# Altium PCB 主控.PcbDoc
Units mil, origin at the board's own origin, x right, y up, seen from the top; angles counter-clockwise.
Board outline 2677.17 x 2677.17 mil, 2 copper layers (Top Layer, Bottom Layer); 105 components, 91 nets, 370 pads, 96 vias.
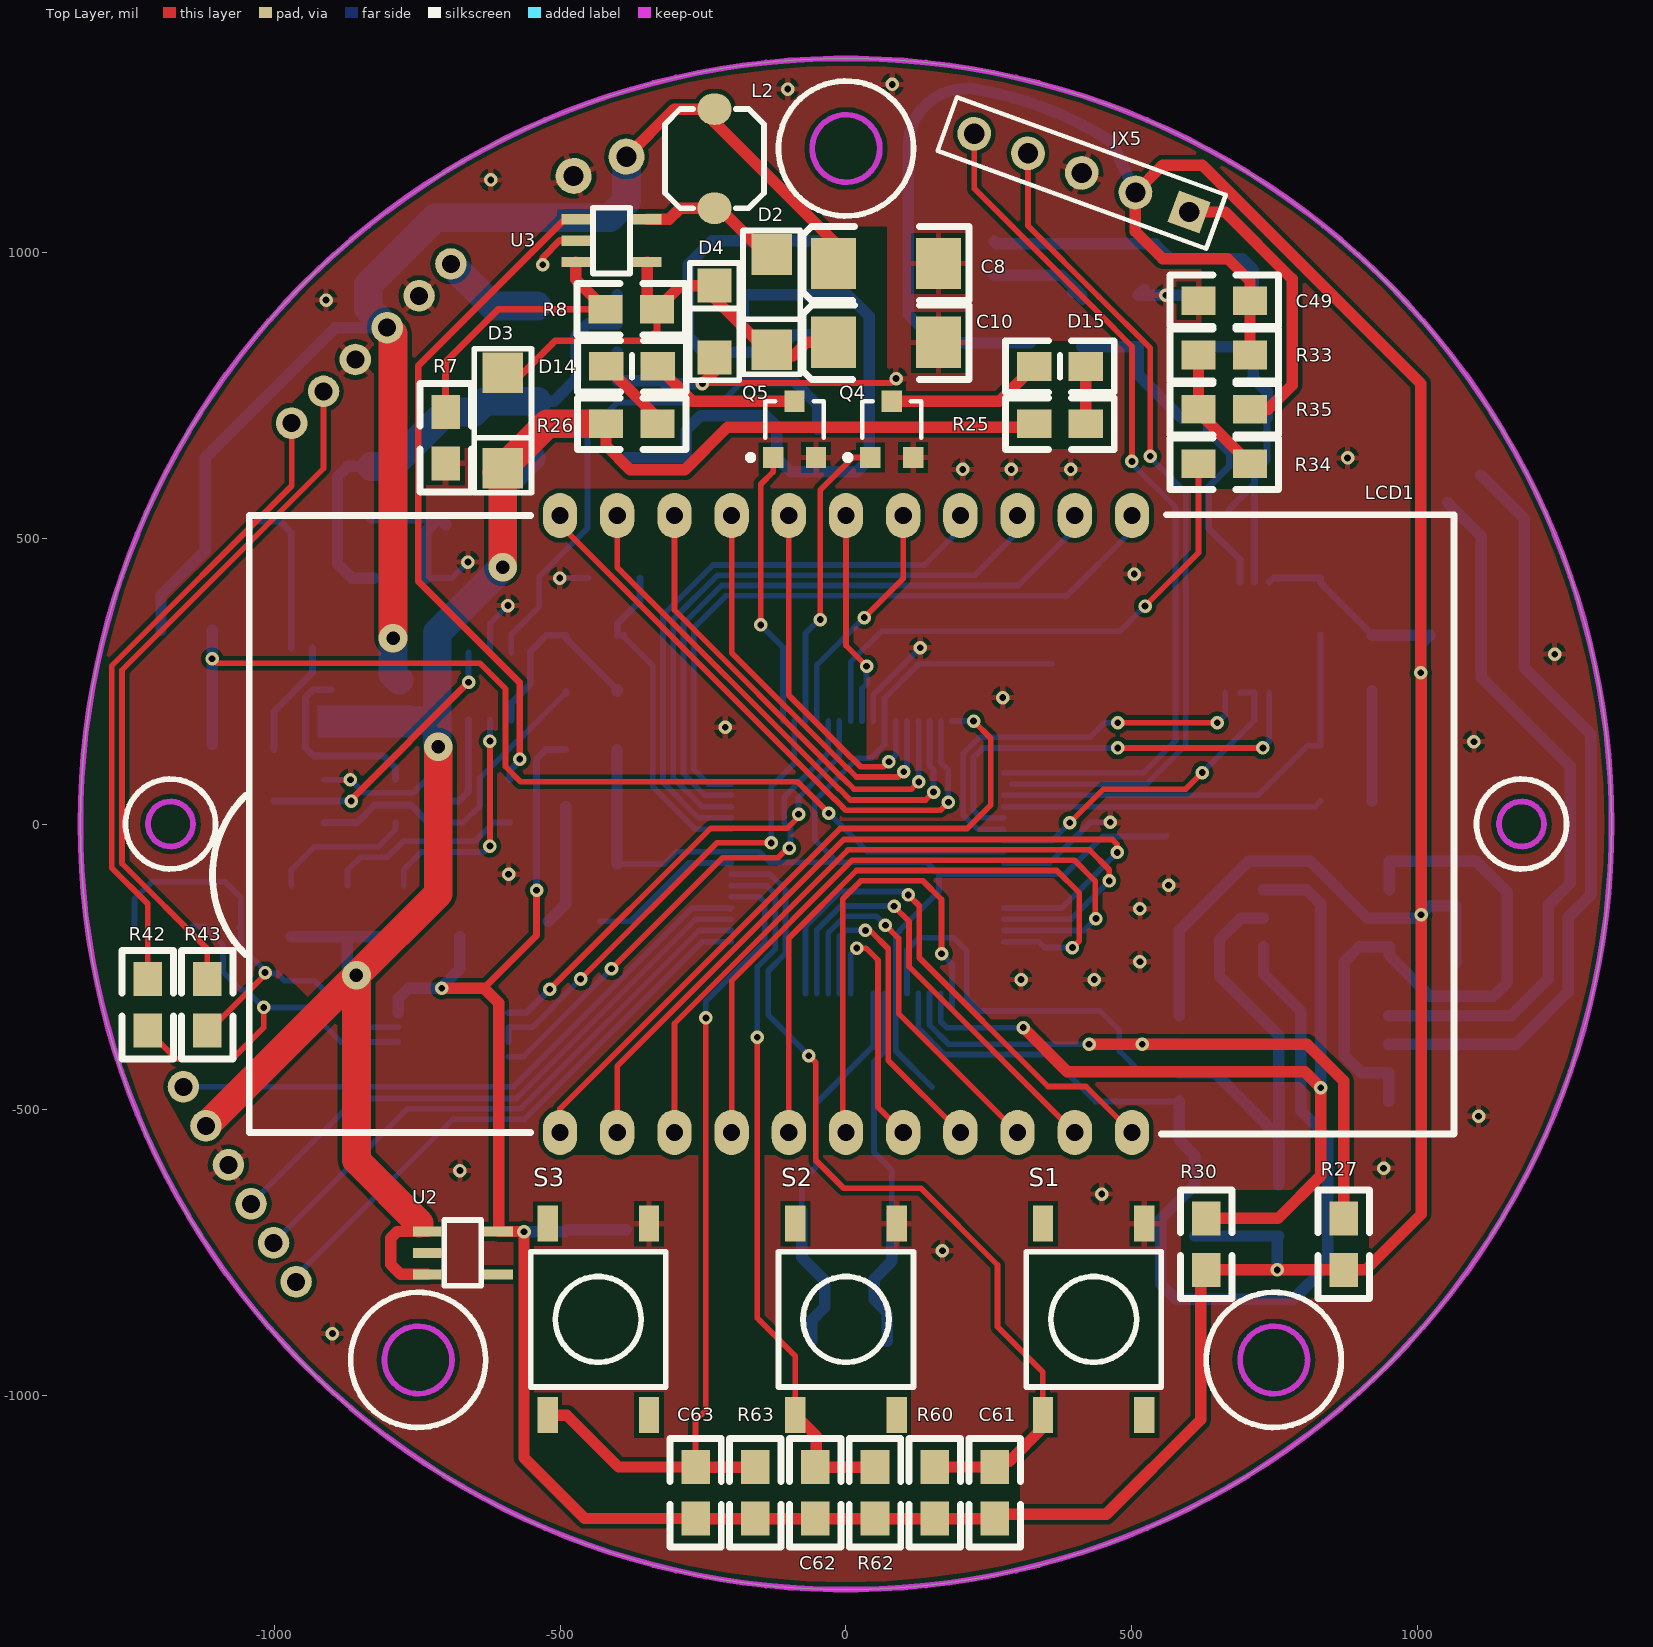
[diagram p0: Top Layer view]
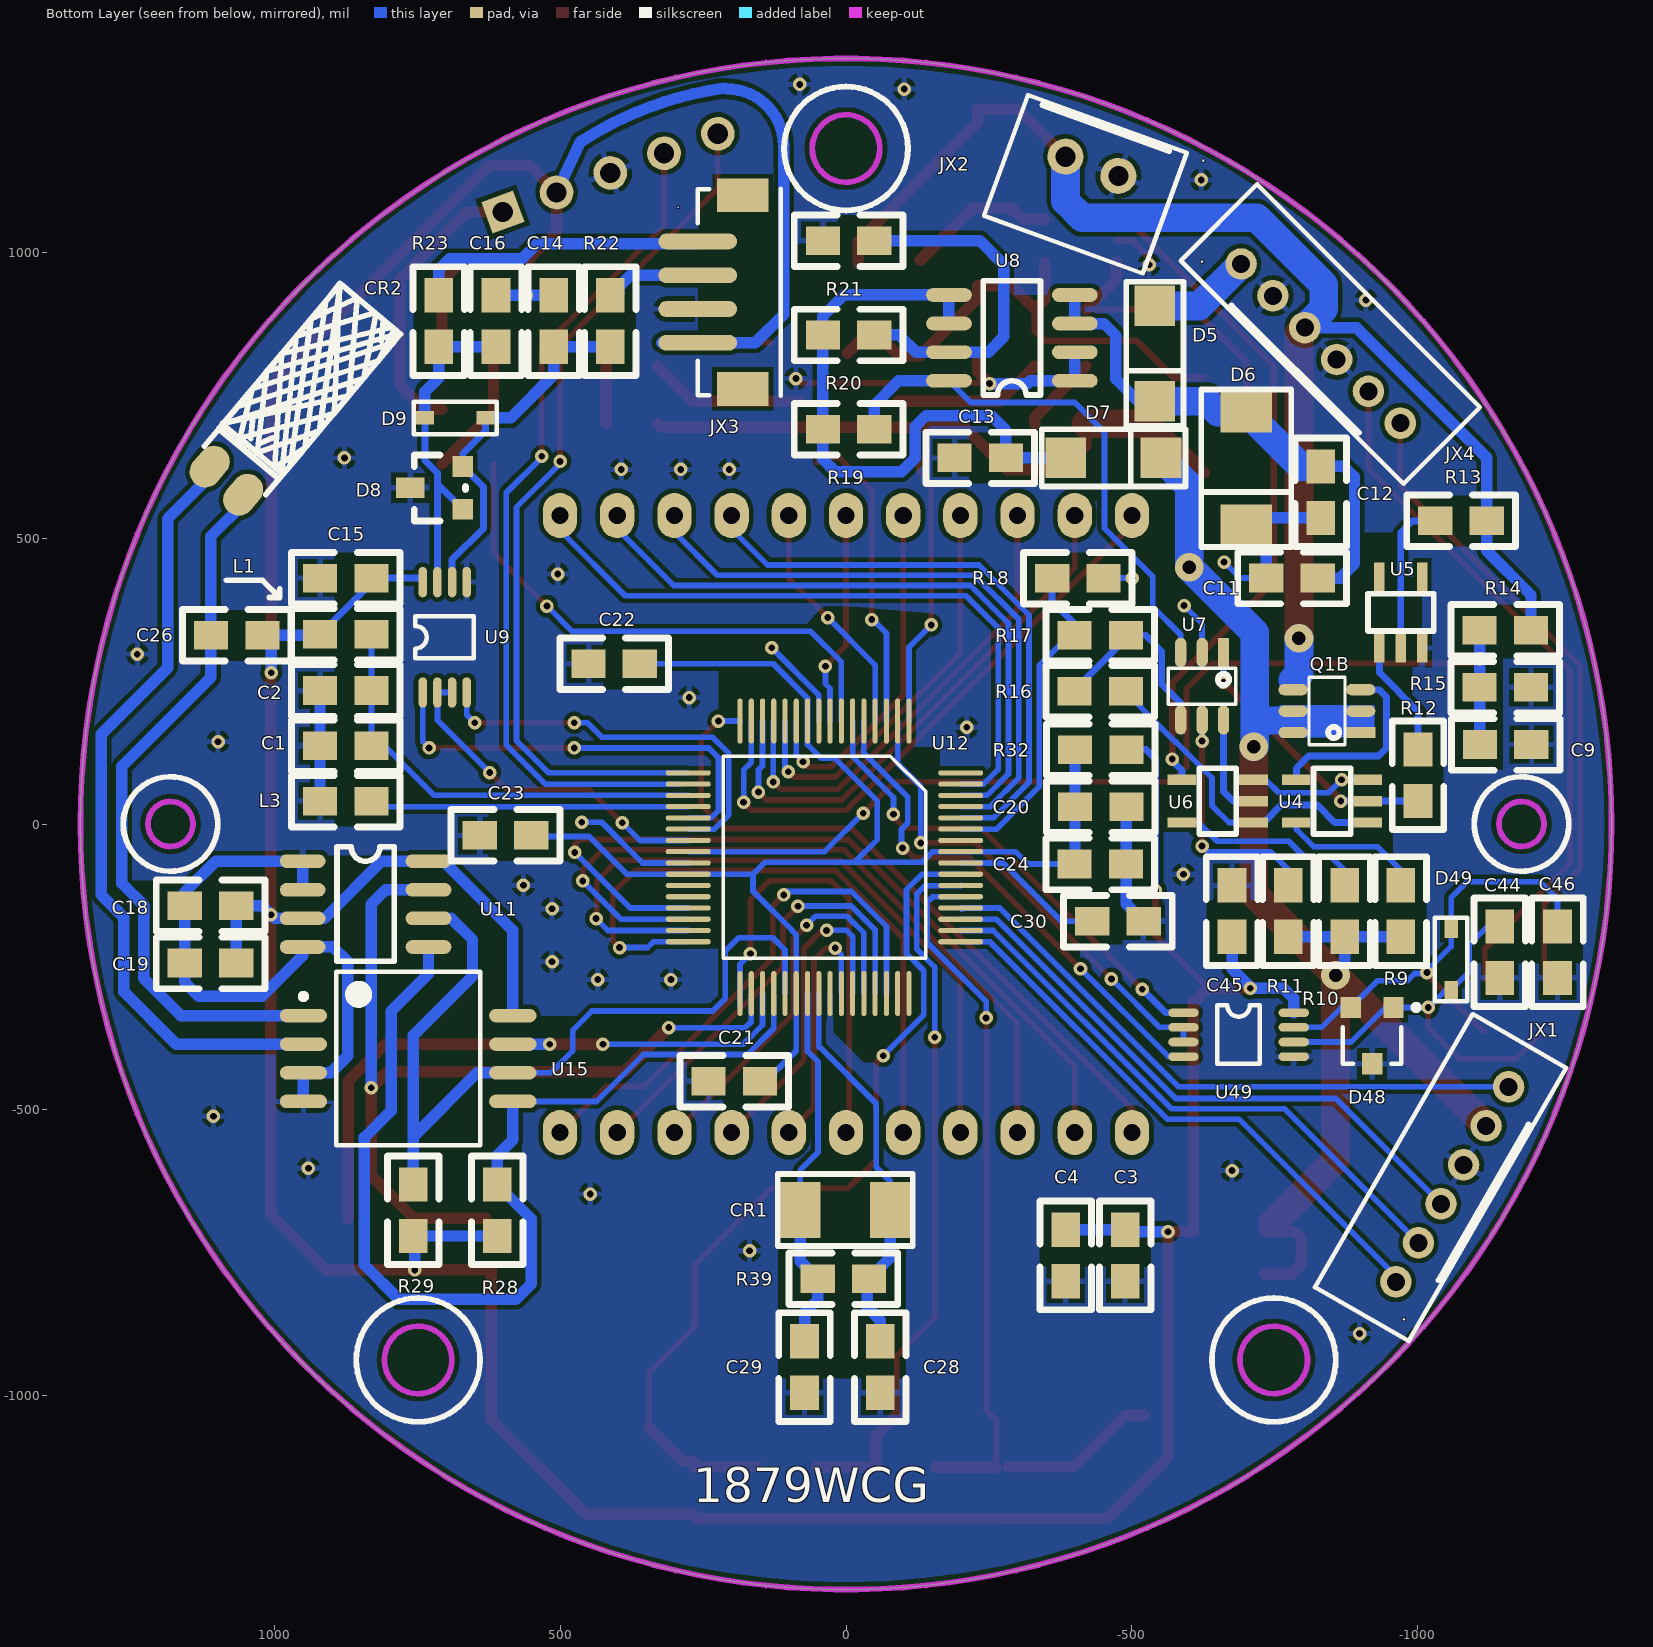
[diagram p1: Bottom Layer view, seen from below]

## Layer stack, top to bottom
Top Solder: solder mask 0.4, Solder Resist, Dk 3.5
Top Layer: signal copper 1.4
Dielectric1: dielectric 12.6, FR-4, Dk 4.8
Bottom Layer: signal copper 1.4
Bottom Solder: solder mask 0.4, Solder Resist, Dk 3.5

## Board outline
-1338.58,0 ccw(c0,0) 0,-1338.58 ccw(c0,0) 1338.58,0 ccw(c0,0) 0,1338.58 ccw(c0,0)

## Design rules (kind name [scope] priority, off if disabled: settings)
Clearance [All] p1: gap=8
FabricationTestPointUsage TestPointUsage [All] p1: valid=0 allowmultiple=FALSE
FabricationTestpoint Testpoint [All] p1: side=3 testpointundercomponent=TRUE minsize=40 maxsize=100 preferedsize=60 minholesize=0 maxholesize=40 preferedholesize=32 testpointgrid=1 allowsidetop=TRUE allowsidebottom=TRUE usegrid=TRUE gridtolerance=0.01
PolygonConnect [All] p1: connectstyle=Relief reliefconductorwidth=10 reliefentries=4 polygonreliefangle="90 Angle" airgapwidth=10
RoutingVias [All] p1: holewidth=28 width=50 viastyle="Through Hole" minholewidth=28 minwidth=50 maxholewidth=28 maxwidth=50
SilkToSolderMaskClearance SilkscreenOverComponentPads [IsPad] p1: minsilkscreentomaskgap=10 clearancetoexposedcopper=TRUE
SolderMaskExpansion [All] p1: expansion=4
Width [All] p1: maxlimit=100 minlimit=10 preferedwidth=20
27 further rules are at their usual default settings.

## Components (designator, comment, footprint, x,y, rotation, side; value= is the part's Value field where it differs from the comment)
C1 "Cap" 0805#1 919.27,136.67 r180 bottom
C2 "Cap" 0805#1 919.27,233.33 r180 bottom
C3 "Cap" 0805#2 -488.04,-709.72 r270 bottom
C4 "Cap Pol1" 0805#1 -384.04,-709.72 r270 bottom
C8 "Cap Pol1" 6032 70,980 r0 top
C9 "Cap" 0805#1 -1198,139 r0 bottom
C10 "Cap Pol1" 6032 70,842 r0 top
C11 "Cap" 0805#1 -735.32,430 r180 bottom
C12 "Cap" 0805#1 -830,535.5 r90 bottom
C13 "Cap" 0805#1 -190,640 r180 bottom
C14 "Cap" 0805#1 511,923.98 r270 bottom
C15 "Cap" 0805#1 830,430 r0 bottom
C16 "Cap" 0805#1 612.04,923.98 r270 bottom
C18 "Cap" 0805#2 1066.36,-142.96 r0 bottom
C19 "Cap" 0805#2 1155.64,-242.96 r180 bottom
C20 "Cap" 0805#1 -490,30 r0 bottom (schematic designator C21)
C21 "Cap" 0805#1 240,-450 r180 bottom (schematic designator C20)
C22 "Cap" 0805#1 450,280 r180 bottom
C23 "Cap" 0805#1 640,-20 r180 bottom
C24 "Cap" 0805#1 -400,-70 r180 bottom
C26 "Cap" 0805#2 1110,330 r180 bottom
C28 "Cap" 0805#1 -60,-905 r270 bottom
C29 "Cap" 0805#1 72.52,-905 r270 bottom
C30 "Cap" 0805#1 -520,-170 r0 bottom
C44 "Cap" 0805#1 -1143,-269 r90 bottom
C45 "Cap" 0805#1 -675,-197 r90 bottom
C46 "Cap" 0805#1 -1244,-269 r90 bottom
C49 "Cap" 0805#1 616.72,914.96 r0 top
C61 "Cap" 0805#1 260,-1213.91 r90 top
C62 "Cap" 0805#1 -53.8,-1213.91 r90 top (schematic designator C101)
C63 "Cap" 0805#1 -263,-1213.91 r90 top (schematic designator C102)
CR1 "CRYSTAL" CRYSTAL -77.48,-675 r180 bottom
CR2 "32768Hz" "X3 - 1" 1160,680 r220 bottom
D2 "5819" 1812D -130,980 r270 top
D3 "5819" 1812D -600,773.06 r270 top
D4 "D Zener" LL-34 -230,878.4 r90 top
D5 "SS14" 1812D -540,890 r270 bottom
D6 "1SMB9.0AT3G" SMB -699.96,720.36 r90 bottom
D7 "Diode" 1812D -400,640 r180 bottom
D8 "PSM712" SOT-23#1 670,550 r270 bottom
D9 "PSD12C" SOD-323 630,710 r180 bottom
D14 "LED0" 0805#1 -419,800 r0 top locked
D15 "LED0" 0805#1 418.64,800 r180 top
D48 "PSM712" SOT-23#2 -920,-370 r0 bottom
D49 "PSD12C" SOD-323 -1058,-290 r270 bottom
JX1 "CON6" PH2.0-6P -1060,-630 r120 bottom
JX2 "CON2" XH2.54-2P -430,1150 r20 bottom
JX3 "CON4" ZH1.5-1X4-SMT 220,930 r270 bottom
JX4 "CON6" PH2.0-6P -830,840 r225 bottom
JX5 "CON5" HDR1X5 600,1070 r160 top
L1 "Inductor" 0805#1 919.27,331.67 r180 bottom
L2 "Inductor" LPS4018 -230,1250 r180 top
L3 "Inductor" 0805#1 919.27,40 r180 bottom
LCD1 "LCD" YJ11*2*2.54 0,0 r0 top locked
Q1B "TPC6111" SSOP6 -900,160 r90 bottom
Q4 "8050" SOT-23#2 80,690 r0 top
Q5 "8050" SOT-23#2 -90,690 r0 top
R7 "Res2" 0805#1 -700,720 r270 top
R8 "Res2" 0805#1 -420,900 r0 top
R9 "Res2" 0805#1 -970,-107.72 r270 bottom
R10 "Res2" 0805#1 -871.72,-197 r90 bottom
R11 "Res2" 0805#1 -773.28,-107.72 r270 bottom
R12 "Res2" 0805#1 -1000,130 r270 bottom
R13 "Res2" 0805#1 -1120,530 r0 bottom
R14 "Res2" 0805#1 -1108,339 r180 bottom
R15 "Res2" 0805#1 -1108,239 r180 bottom
R16 "Res2" 0805#1 -400,232 r180 bottom
R17 "Res2" 0805#1 -400,330 r180 bottom
R18 "Res2" 0805#1 -450,430 r0 bottom
R19 "Res2" 0805#1 40,690 r180 bottom
R20 "Res2" 0805#1 -49.28,855.08 r0 bottom
R21 "Res2" 0805#1 40,1020 r180 bottom
R22 "Res2" 0805#1 412,923.98 r270 bottom
R23 "Res2" 0805#1 712.04,923.98 r270 bottom
R25 "Res2" 0805#1 418.64,700 r180 top
R26 "Res2" 0805#1 -330,700 r180 top
R27 "Res2" 0805#1 870,-690 r270 top
R28 "Res2" 0805#2 610,-630.72 r270 bottom
R29 "Res2" 0805#2 756.61,-630.72 r270 bottom
R30 "Res2" 0805#2 630,-690 r270 top
R32 "Res2" 0805#1 -490,130 r0 bottom
R33 "Res2" 0805#1 616.72,819.97 r0 top
R34 "Res2" 0805#1 616.72,630 r0 top
R35 "Res2" 0805#1 706,725.06 r180 top
R39 "Res2" 0805#1 49.27,-795 r180 bottom
R42 "Res2" 0805#1 -1220.92,-271.36 r270 top
R43 "Res2" 0805#1 -1116.96,-271.36 r270 top
R60 "Res2" 0805#1 155.32,-1124.64 r270 top
R62 "Res2" 0805#1 50.72,-1124.64 r270 top
R63 "Res2" 0805#1 -158.48,-1124.64 r270 top (schematic designator R102)
S1 "Key" "BUTTON - duplicate" 433.07,-866.14 r90 top
S2 "Key" "BUTTON - duplicate" 0,-866.14 r90 top
S3 "Key" "BUTTON - duplicate" -433.07,-866.14 r90 top
U2 "ADP160AUJZ-3.3" SOT23-5 -670,-750 r90 top
U3 "MAX1723" SOT23-5 -410,1020 r90 top
U4 "SN74LVC1G00" SOT23-5 -850,40 r270 bottom
U5 "BD4933" SOT23-5 -970,370 r0 bottom
U6 "SN74LVC1G08" SOT23-5 -650,40 r270 bottom
U7 "SN74LVC2G14" SSOP6 -660,300 r0 bottom
U8 "TPS77801D" SO-8 -290,850 r180 bottom
U9 "MAX3471" MSOP-8 740,230 r90 bottom
U11 "CAT24C512WI-GT3" SO-8 840,-140 r0 bottom
U12 "PIC24FJ64GA306" S-PQFP-G64 -110,180 r270 bottom locked
U15 "PCF8583" SOIC127P1030X265-8N 765.59,-410 r180 bottom
U49 "MAX3471" MSOP-8 -590,-330 r180 bottom

## Footprints (in the part's own frame and the unit in brackets; to place one, negate y for a bottom-side part, rotate by r counter-clockwise, add the part's x,y. Pads: shape width x height; smd on the part's side, far side on the other; paste and mask are expansions set on the pad)
0805#1 [mil]
  rect 60x50 smd: 1(-0.36,0.04) 2(89.64,0.04)
  silkscreen extent -50,-45 140,45
0805#2 [mil]
  rect 60x50 smd: 1(-0.36,-0.04) 2(89.64,-0.04)
  silkscreen extent -50,-45 140,45
1812D [mm]
  rect 1.8x1.8 smd: 1(-0.4,0) 2(3.829,0)
  silkscreen extent -1.47,-1.27 4.92,1.27
6032 [mil]
  rect 78.74x90 smd: 1(-91.61,0) 2(91.61,0)
  silkscreen extent -145,-65 145,65
"BUTTON - duplicate" [mm] "贴片按键6mmX6mm"
  rect 1.6x0.9 smd: 1(-4.25,2.25) 2(-4.25,-2.25) 3(4.25,-2.25) 4(4.25,2.25)
  Top Layer pour cut-out: -3.048,2.984 3.048,2.985 3.048,-3.048 -3.048,-3.048
  silkscreen extent -3,-3 3,3
CRYSTAL [mm]
  rect 1.8x2.5 smd: 1(-4,0) 2(0,0)
  silkscreen extent -5,-1.6 1,1.6
HDR1X5 [mm] "Connector; Header; 5 Position"
  rect 1.5x1.5 hole 0.9: 1(0,0)
  round 1.5 hole 0.9: 2(2.54,0) 3(5.08,0) 4(7.62,0) 5(10.16,0)
  silkscreen extent -1.27,-1.27 11.43,1.27
LL-34 [mm]
  rect 1.5x1.5 smd: 1(-1.6,0) 2(1.6,0)
  silkscreen extent -2.6,-1.1 2.6,1.1
LPS4018 [mm]
  oval 1.524x1.4 smd: 1(0,0) 2(0,4.4)
  silkscreen extent -2.2,0 2.2,4.4
MSOP-8 [mm]
  oval 1.35x0.38 smd: 1(0,0) 2(0,-0.65) 3(0,-1.3) 4(0,-1.95) 5(4.9,-1.95) 6(4.9,-1.3) 7(4.9,-0.65) 8(4.9,0)
  silkscreen extent 1.51,-2.28 3.39,0.33
PH2.0-6P [mm] "Connector; Header; 6 Position"
  round 1.4 hole 0.8: 1(-5,0) 2(-3,0) 3(-1,0) 4(1,0) 5(3,0) 6(5,0)
  silkscreen extent -7,-1.8 7,3
S-PQFP-G64 [mm]
  oval 2x0.23 smd: 1(0,0) 2(0,-0.5) 3(0,-1) 4(0,-1.5) 5(0,-2) 6(0,-2.5) 7(0,-3) 8(0,-3.5) 9(0,-4) 10(0,-4.5) 11(0,-5) 12(0,-5.5) 13(0,-6) 14(0,-6.5) 15(0,-7) 16(0,-7.5) 33(12.1,-7.5) 34(12.1,-7) 35(12.1,-6.5) 36(12.1,-6) 37(12.1,-5.5) 38(12.1,-5) 39(12.1,-4.5) 40(12.1,-4) 41(12.1,-3.5) 42(12.1,-3) 43(12.1,-2.5) 44(12.1,-2) 45(12.1,-1.5) 46(12.1,-1) 47(12.1,-0.5) 48(12.1,0)
  oval 0.23x2 smd: 17(2.3,-9.8) 18(2.8,-9.8) 19(3.3,-9.8) 20(3.8,-9.8) 21(4.3,-9.8) 22(4.8,-9.8) 23(5.3,-9.8) 24(5.8,-9.8) 25(6.3,-9.8) 26(6.8,-9.8) 27(7.3,-9.8) 28(7.8,-9.8) 29(8.3,-9.8) 30(8.8,-9.8) 31(9.3,-9.8) 32(9.8,-9.8) 49(9.8,2.3) 50(9.3,2.3) 51(8.8,2.3) 52(8.3,2.3) 53(7.8,2.3) 54(7.3,2.3) 55(6.8,2.3) 56(6.3,2.3) 57(5.8,2.3) 58(5.3,2.3) 59(4.8,2.3) 60(4.3,2.3) 61(3.8,2.3) 62(3.3,2.3) 63(2.8,2.3) 64(2.3,2.3)
  silkscreen extent 1.56,-8.24 10.54,0.74
SMB [mm]
  rect 1.8x2.3 smd: 1(-5,0) 2(0,0)
  silkscreen extent -6,-2 1,2
SO-8 [mil]
  oval 80x24 smd: 1(110,-75) 2(110,-25) 3(110,25) 4(110,75) 5(-110,75) 6(-110,25) 7(-110,-25) 8(-110,-75)
  silkscreen extent -50,-100 50,100
SOD-323 [mm]
  rect 0.8x0.6 smd: 1(-2.7,0) 2(0,0)
  silkscreen extent -3.2,-0.72 0.5,0.72
SOIC127P1030X265-8N [mm] "SOIC, 8-Leads, Body 7.7x7.6mm (max), Pitch 1.27mm, IPC Medium Density"
  oval 2.1x0.6 smd: 1(-4.65,1.905) 2(-4.65,0.635) 3(-4.65,-0.635) 4(-4.65,-1.905) 5(4.65,-1.905) 6(4.65,-0.635) 7(4.65,0.635) 8(4.65,1.905)
  silkscreen extent -4.78,-3.85 3.2,3.85
SOT23-5 [mil]
  rect 18x50 smd: 1(37.5,62.5) 2(0,62.5) 3(-37.5,62.5) 4(-37.5,-62.5) 5(37.5,-62.5)
  silkscreen extent -58,-32 58,32
SOT-23#1 [mil]
  rect 36x36 smd: 1(0,0) 2(-75,0)
  rect 36x50 smd: 3(-38,-91.81)
  silkscreen extent -95,-85 20,5
SOT-23#2 [mil] "SOT-23; 3 Leads; Body 3.0 x 2.6 mm, inc. leads (LxW max)"
  rect 35.43x37.4 smd: 1(-37.4,-49.21) 2(37.4,-49.21) 3(0,49.21)
  silkscreen extent -82,-54 51,49
SSOP6 [mm]
  rect 0.508x1.3 smd: 1(0,0)
  oval 0.508x1.3 smd: 2(0.95,0) 3(1.9,0) 4(1.9,3) 5(0.95,3) 6(0,3)
  silkscreen extent -0.55,0.7 2.45,2.3
"X3 - 1" [mm]
  oval 1.4x2 smd: 1(1.824,-0.3) 2(3.764,-0.3)
  silkscreen extent 1.02,0.24 4.54,9.65
XH2.54-2P [mm] "Connector; Header; 6 Position"
  round 1.6 hole 0.9: 1(-1.25,0) 2(1.25,0)
  silkscreen extent -3.75,-2 3.75,3.7
YJ11*2*2.54 [mil] "液晶屏封装"
  oval 60x78.74 hole 30: 1(500,539.37) 2(400,539.37) 3(300,539.37) 4(200,539.37) 5(100,539.37) 6(0,539.37) 7(-100,539.37) 8(-200,539.37) 9(-300,539.37) 10(-400,539.37) 11(-500,539.37) 12(-500,-539.37) 13(-400,-539.37) 14(-300,-539.37) 15(-200,-539.37) 16(-100,-539.37) 17(0,-539.37) 18(100,-539.37) 19(200,-539.37) 20(300,-539.37) 21(400,-539.37) 22(500,-539.37)
  silkscreen extent -1108,-542 1063,541
ZH1.5-1X4-SMT [mm] "Connector; Header; 6 Position"
  rect 1.5x2.3 smd: 0(-4.3,1) 0(4.3,1)
  oval 0.7x3.5 smd: 1(-2.25,-1) 2(-0.75,-1) 3(0.75,-1) 4(2.25,-1)
  silkscreen extent -4.6,-1 4.6,2.7

## Part data
C1 C11 C30: library part "Cap Pol1", "Polarized Capacitor"
C2 C3 C9 C12 C13 C14 C15 C16 C18 C19 C20 C21 C22 C23 C24 C26 C28 C29 C44 C45 C46 C49 C61 C62 C63: "Capacitor"
C4 C8 C10: "Polarized Capacitor"
CR1: "晶振"
CR2: library part CRYSTAL, "晶振"
D2 D3: library part IN5819, "Bilin 贴片整流二极管"
D4: "Zener Diode"
D5: library part Diode, "Default Diode"
D6: "Zener Diode 1SMB9.0AT3G"
D7: "Default Diode"
D8 D48: library part DIODE_TVSBI2, "Diode Tunnel"
D9 D49: library part DIODE_TVSBI, "Diode Tunnel"
D14 D15: "Typical INFRARED GaAs LED"
JX1: library part "Header 6", "Header, 6-Pin"
JX2 JX5: "外接端子"
JX3: library part "Header 4", "Header, 4-Pin"
LCD1: "液晶屏"
Q1B: "P-MOS管"
Q4 Q5: "NPN三极管"
R7 R8 R9 R10 R11 R12 R13 R14 R15 R16 R17 R18 R19 R20 R21 R22 R23 R25 R26 R27 R28 R29 R30 R32 R33 R34 R35 R39 R42 R43 R60 R62 R63: "Resistor"
S1 S2 S3: "无声 6*6*5 贴片 无声按键"
U2: library part ADP160AUJZ-3.0, "ADI 3.3V稳压"
U3: "1.5μA IQ, Step-Up DC-DC Converters"
U4: library part SN74LVC1G08, "与门逻辑芯片"
U5: "电压检测芯片"
U6: "与门逻辑芯片"
U7: "施密特反相器"
U8: library part TPS77701D, "可调稳压芯片"
U9 U49: "485半工通讯"
U12: "PIC单片机24位"
U15: "时钟芯片"

## Via types
v1: diameter 23.62, hole 11.81, Top Layer to Bottom Layer, 92 vias
v2: diameter 50, hole 23.62, Top Layer to Bottom Layer, 4 vias

## Nets (pads, with @x,y where several pads share a name; then routed paths per layer and width w, separated by ;. In a path a pad name is that pad's centre, name@x,y a point inside that pad or via, vN(x,y) a via of type N, cw(c..) or ccw(c..) an arc to the next point about the centre after c; other vN are vias at no path point)
3.6V: C8.1 JX2.2 JX4.3 L2.1 Q1B.4 R13.1 R14.2 | length 2594
  Top Layer w20: JX2.2 -300.59,1250 L2.1 -230,1227 -21.61,1018.61 C8.1
  Top Layer w50: JX4.3 -792,857.68 v2(-792,325)
  Bottom Layer w20: R14.2 -1197.64,400.36 -1120.36,477.64 R13.1 -1120.36,640.21 -892.73,867.84 JX4.3
  Bottom Layer w50: JX4.3 -835,900.68 -835,943 -718,1060 -413,1060 -383.76,1089.24 JX2.2 ; v2(-792,325) -792,262 -781,251
5VCC: D5.1 JX4.1 | length 181.2
  Bottom Layer w50: JX4.1 -617.36,905.75 D5.1
AGND: L3.2 U12.20 | length 557.8
  Bottom Layer w10: U12.20 819.99,30.39 L3.2
AVDD: C1.2 C2.2 L1.2 U12.19 | length 784.7
  Bottom Layer w10: U12.19 363.82,50.08 720.08,50.08 806.71,136.71 C1.2 C2.2 L1.2
BAT_NONE: U6.2 U7.6 | length 194.4
  Bottom Layer w12: U6.2@-722.5,40 -677,40 -660,57 U7.6
BAT_TEST: C9.2 R14.1 R15.1 U12.24 | length 1804
  Top Layer w10: v1(-1108.36,289) -1100.36,281 -640,281 -595.31,236.31 -595.31,100.31 -569,74 -85,74 v1(-30,19)
  Bottom Layer w10: v1(-30,19) 37.35,-48.35 U12.24
  Bottom Layer w20: C9.2 v1(-1108.36,289) -1108.36,338.31 R14.1
BAT_UP: U3.1 U6.4 | length 1187.9
  Top Layer w12: v1(-570.5,113.5) -570.5,247.5 -748,425 -748,801 -491.5,1057.5 U3.1
  Bottom Layer w12: U6.4@-589,79 U6.4 -587.5,93.5 -575,106 -575,109 v1(-570.5,113.5)
COM0: LCD1.1 U12.63 | length 1186.5
  Bottom Layer w10: U12.63 -240.5,69.76 -266,95.27 -266,343 -210,399 386,399 500,513 LCD1.1
COM1: LCD1.2 U12.62 | length 1137.7
  Bottom Layer w10: U12.62 -246.27,50.08 -284,87.81 -284,350.46 -217.46,417 301,417 400,516 LCD1.2
COM2: LCD1.3 U12.61 | length 1105.8
  Bottom Layer w10: U12.61@-208.61,30.39 U12.61 -252.04,30.39 -302,80.36 -302,357.91 -224.91,435 225,435 300,510 LCD1.3@300,543
COM3: LCD1.4 U12.60 | length 1043.4
  Bottom Layer w10: U12.60 -257.81,10.71 -320,72.9 -320,365.37 -232.37,453 137,453 200,516 LCD1.4
EXT: R16.2 U4.1 U6.1 | length 574
  Bottom Layer w10: U6.1 -669.5,2.5 -640,32 -640,80.5 -577.2,143.3 -575.67,143.3 -491.05,227.92 R16.2@-489.64,227.92
  Bottom Layer w12: U4.1 -854.5,2.5 -824,33 -761,33 -730.5,2.5 U6.1 ; R16.2@-489.64,227.92 R16.2
EXT_TEST: R17.1 R18.2 U12.59 | length 590.2
  Bottom Layer w10: R17.1 -391.04,330.04 -338,277 -338,65.44 -263.58,-8.98 U12.59
  Bottom Layer w12: R17.1@-389.04,330.04 R17.1 -399.64,350.32 -360.36,389.6 R18.2
GND: C1.1 C2.1 C3.2 C4.2 C8.2 C9.1 C10.2 C11.1 C12.1 C13.1 C14.1 C15.2 C16.1 C18.2 C19.1 C20.1 C21.1 C22.1 C23.1 C24.2 C28.2 C29.2 C30.1 C44.1 C45.2 C46.1 C49.1 D4.1 D6.1 D8.3 D48.3 JX1.4 JX2.1 JX3.3 JX4.2 JX4.4 JX5.3 L3.1 Q4.2 Q5.2 R7.2 R15.2 R18.1 R21.1 S1.3 S2.3 S3.3 U2.2 U3.2 U4.3 U5.3 U6.3 U7.2 U8.1 U8.2 U9.5 U11.1 U11.2 U11.4 U12.9 U12.25 U12.41 U15.3 U15.4 U49.5 | length 3425.9
  Top Layer w10: v1(-251,770) -250.09,770.91 79.66,770.91 v1(87.64,778.89) ; C10.2@132,842 142,842 C10.2
  Top Layer w12: v1(-530,978) -530,990.5 -500.5,1020 U3.2
  Top Layer w20: v1@-250.09,770.91 -230,791 D4.1
  Bottom Layer w10: U4.3 v1(-866.5,77.5) -843.55,54.55 -756.55,54.55 -733.6,77.5 U6.3 ; -734.96,455.08 C11.1 -688.96,430.04 v1(-661,458) ; U7.2 -622.6,350.4 v1(-591,382) ; v1@-500.36,429 -499.4,429.96 R18.1 ; C24.2@-490.36,-69.24 C24.2 ; C20.1 C20.1@-489.64,29.24 ; U12.9 47.48,225.72 v1(129.76,308) ; U12.25 356.06,-68.03 427.09,3 v1(462,3)
  Bottom Layer w20: C12.1 D6.1@-711.59,535.14 ; C11.1 -734.96,511.77 D6.1@-711.59,535.14 ; D6.1 D6.1@-711.59,535.14 ; C30.1 -489.64,-139.31 C24.2 ; C24.2@-490.36,-69.24 C20.1 ; U8.2 U8.1 -322,775 -317,770 v1(-251,770) ; C14.1@521.17,934.55 C14.1 C16.1 ; v1(559,924.35) v1@559,926.35 ; L3.1 C1.1 C2.1 ; U15.4 U15.3 901,-435 871,-405 871,-241 897,-215 U11.4 950,-230 1021,-301 1132,-301 1156,-277 C19.1 C18.2 1156,-118.92 1102.08,-65 U11.1 U11.2
  other v1: -898,-891 168.62,-746.14 447,-647 -675,-606 940,-602 1106,-511 306,-272 434,-272 514,-241 514,-148 564,-107 -590,-88 1098,144 -211,169 274,221 1239,297 -500.36,430 504,437 204,620 289,620 393,620 877,640 -909,916 -621,1126 -102,1285 81,1293
GP_EN: JX1.6 U12.52 | length 1092.9
  Bottom Layer w10: JX1.6@-1156.23,-461.71 JX1.6 -581.43,-459.52 -268.68,-146.77 U12.52 U12.52@-202.24,-148.46
GP_LK: JX1.1 U12.49 | length 1010.3
  Bottom Layer w10: JX1.1@-966.55,-795.5 -687.05,-516 -561.54,-516 -251.37,-205.83 U12.49
KEY1: C61.2 R60.1 S1.1 U12.55 | length 1540.6
  Top Layer w10: v1(-65,-405) -53,-417 -53,-588 -4,-637 131,-637 265.04,-771.04 265.04,-879 344,-957.96 344,-1032.98 S1.1 S1.1@344.49,-1045
  Top Layer w20: R60.1 259.6,-1124.28 259.96,-1124.64 C61.2@265.04,-1124.64 ; C61.2@265.04,-1114.45 285.23,-1114.45 S1.1@344.49,-1055.19
  Bottom Layer w10: U12.55 -132.83,-87.72 -105.82,-114.73 -105.82,-226.27 -136,-256.46 -136,-334 v1(-65,-405)
KEY2: C62.2 R62.1 S2.1 U12.54 | length 1243.5
  Top Layer w10: v1(-155,-373) -155,-864 -88.58,-930.42 S2.1
  Top Layer w20: S2.1 -51.81,-1070.24 -51.81,-1124.64 R62.1@50.76,-1124.64
  Bottom Layer w10: U12.54 -200.14,-107.81 -138.19,-107.81 -123.82,-122.18 -123.82,-218.82 -155,-250 v1(-155,-373)
KEY3: C63.2 R63.1 S3.1 U12.53 | length 1481.8
  Top Layer w10: C63.2 -263.04,-1043.04 -245,-1025 -245,-933.98 v1(-245,-339)
  Top Layer w20: S3.1 -488.54,-1033.46 -397.72,-1124.28 C63.2@-283.4,-1124.28 ; C63.2@-263.04,-1124.64 R63.1@-157.42,-1124.64
  Bottom Layer w10: v1(-245,-339) -245,-309.91 -141.82,-206.72 -141.82,-137 -151.73,-127.09 U12.53
LED_GREEN: Q5.1 U12.1 | length 516.9
  Top Layer w10: v1(-149,348) -149,594 -127.4,615.6 Q5.1
  Bottom Layer w10: v1(-149,348) -110,309 -110,272 ; U12.1 -110,272 ; -110,303 -110,272
LED_RED: Q4.1 U12.3 | length 549.9
  Top Layer w10: v1(-45,357.5) -45,584 11.79,640.79 33.21,640.79 41.61,632.39 51,632.39 Q4.1
  Bottom Layer w10: U12.3 -70.63,333.37 v1@-45.75,358.25
MCLR: R33.1 R34.2 R35.2 | length 227.3
  Top Layer w20: R33.1 R35.2 616.36,720.04 R34.2
NetC10_1: C10.1 D2.2 D3.1 D4.2 R8.2 U3.4 | length 882.6
  Top Layer w12: D3.1@-626,780.81 -572.19,780.81 -507.96,845.04 -347,845.04 -330.36,861.68 R8.2
  Top Layer w20: U3.4 -347.5,917.18 R8.2 -289.01,941.39 D4.2 -230,918.99 -130,818.99 -92.01,818.99 -69,842 C10.1 C10.1@-3,823.39
NetC11_2: C11.2 C12.2 D5.2 D6.2 U8.3 U8.4 | length 920.9
  Bottom Layer w20: C12.2 -870.82,625.14 -889.06,606.9 -889.06,455.06 -864.04,430.04 C11.2 ; D5.2 -510.75,739.25 -472,778 -472,854 -451,875 U8.3 U8.4
  Bottom Layer w50: C12.2 -795.18,625.14 D6.2 -649.89,720.36 -631,739.25 D5.2
NetC13_2: C13.2 D7.1 R19.1 R20.2 U8.5 U8.6 | length 1101.6
  Bottom Layer w20: D7.1 -279.68,640 C13.2 -279.64,688.4 -254.04,714 -140,714 -121,695 -121,640 -97,616 19,616 40.36,637.36 R19.1 R20.2 40.36,888 3.36,925 U8.5 U8.6
NetC14_2: C14.2 D8.2 D9.2 R22.2 U9.6 | length 639.5
  Bottom Layer w10: C14.2@504,834.35 C14.2
  Bottom Layer w12: D9.2 630,687.46 670,647.46 D8.2 634,589 634,517 688.82,462.18 U9.6
  Bottom Layer w20: R22.2 C14.2@504,834.35 ; C14.2 510.96,785.39 586.35,710 D9.2
NetC16_2: C16.2 D8.1 D9.1 R23.2 U9.7 | length 616.3
  Bottom Layer w12: D8.1 714.41,594.41 714.41,613.97 ; U9.7 714.41,613.97 ; D9.1 736.3,635.86 714.41,613.97
  Bottom Layer w20: C16.2 R23.2 712,780 736.3,755.7 D9.1 D9.1@733.92,707.62
NetC20_2: C20.2 C21.2 C22.2 C23.2 C24.1 R32.2 U12.10 U12.26 U12.38 U12.57 | length 2329.3
  Bottom Layer w10: C24.1 -317.96,-69.96 -296.35,-48.35 U12.57 -151.79,-48.35 -133.13,-67 -15,-67 ; C21.2@150.36,-459.96 86.85,-396.45 U12.38 86.85,-194.24 93.81,-187.28 93.81,-186.19 162.53,-117.47 162.53,-87.72 ; C22.2 127.26,280.04 67.16,219.94 U12.10 67.16,138.75 43.58,115.17 20,115.17 -54.81,40.36 -54.81,-27.19 -15,-67 ; C23.2@560.36,-19.96 558.51,-21.81 449.01,-21.81 383.1,-87.72 U12.26 162.53,-87.72 ; -15,-67 141.81,-67 162.53,-87.72
  Bottom Layer w20: R32.2 C20.2 -400.36,-69.24 C24.1
NetC26_1: C26.1 CR2.2 U15.1 | length 1272.4
  Bottom Layer w20: U15.1 1163,-335 1228,-270 1228,-142 1266,-104 1266,101 1110.36,256.64 C26.1 ; CR2.2@1051.81,561.81 1111,502.62 1111,463 ; C26.1@1111,329.96 1111,463 ; 1111,492.62 1111,463
NetC28_1: C28.1 CR1.2 R39.2 U12.40 | length 685.3
  Bottom Layer w10: CR1.2 -77.48,-624.48 -53,-600 -53,-489 45.98,-390.02 ; 47.48,-390.02 U12.40
  Bottom Layer w20: CR1.2 -77.48,-757.84 R39.2 -37.48,-797.84 -37.48,-845 -60.04,-867.56 C28.1
NetC29_1: C29.1 CR1.1 R39.1 U12.39 | length 738.3
  Bottom Layer w10: 67.16,-384 U12.39 67.16,-397.29 49,-415.46 49,-574 80,-605 CR1.1
  Bottom Layer w20: C29.1 72.48,-854.96 49.64,-832.12 R39.1 80,-764.6 CR1.1
NetC30_2: C30.2 U12.56 | length 272.1
  Bottom Layer w10: C30.2 -377.01,-170.04 -275,-68.03 U12.56
NetC44_2: C44.2 D48.1 D49.2 R42.2 U49.6 | length 752.8
  Top Layer w10: R42.2 -1170.88,-411 -1073,-411 -1018,-356 v1(-1018,-320.79)
  Bottom Layer w10: C44.2 -1121.64,-179.36 -1089.2,-211.8 -1089.2,-258.8 D49.2 -1049,-290 -1018.21,-320.79 v1(-1018,-320.79) D48.1 -943.21,-320.79 -882.82,-381.18 U49.6
NetC46_2: C46.2 D48.2 D49.1 R43.2 U49.7 | length 826.3
  Top Layer w10: R43.2 -1113.3,-361 -1015.77,-263.47 v1(-1015.77,-259.85)
  Bottom Layer w10: C46.2 -1243.96,-131.32 -1213.64,-101 -1086,-101 -1058,-129 D49.1 ; D49.1@-1061,-180.7 D49.1 ; U49.7 -831.41,-355.59 -866.21,-320.79 D48.2 -929.39,-274 -981.49,-274 -994,-261.49 -1010.51,-261.49 -1058,-214 -1058,-188.91 D49.1
NetCR2_1: CR2.1 U15.2 | length 1351.2
  Bottom Layer w20: U15.2 1171,-385 1263,-293 1263,-163 1302.03,-123.97 1302.03,156.97 1186,273 1186,458 1186,534 CR2.1@1110,610
NetD2_1: D2.1 L2.2 U3.5 | length 263.3
  Top Layer w20: U3.5 -309.27,1057.5 -290,1076.77 L2.2 -221.28,1076.77 D2.1@-130,985.49
NetD14_1: D14.1 R26.1 | length 137.2
  Top Layer w20: D14.1 -329.64,710.31 R26.1
NetD14_2: D14.2 Q5.3 | length 264.6
  Top Layer w20: D14.2 -268.54,739.21 Q5.3
NetD15_1: D15.1 R25.1 | length 100
  Top Layer w20: R25.1 D15.1
NetD15_2: D15.2 Q4.3 | length 274.2
  Top Layer w20: Q4.3 268.25,739.21 D15.2
NetJX5_1: JX5.1 R35.1 | length 505.5
  Top Layer w20: JX5.1 663,1070 780,953 780,767 738.03,725.03 R35.1
NetQ1B_3: Q1B.3 U4.4 | length 331.5
  Bottom Layer w12: Q1B.3 -932.2,234.8 -945,222 -945,133 -931,119 -809,119 -787.5,97.5 U4.4
NetR7_1: R7.1 R8.1 U3.3 | length 509.5
  Top Layer w12: R7.1 -699.96,808.08 -608,900.04 R8.1
  Top Layer w20: U3.3 -472.5,952.18 R8.1
NetR9_1: R9.1 U4.5 | length 250.9
  Bottom Layer w10: R9.1 -970.04,-80.4 -929.64,-40 -818,-40 -787.5,-9.5 U4.5
NetR10_2: R10.2 U6.5 | length 345.3
  Bottom Layer w10: R10.2 -871.68,-80.68 -849,-58 -802,-58 -774,-30 -649.09,-30 -616.59,2.5 U6.5
NetR11_1: R11.1 U7.5 | length 419.3
  Top Layer w10: v1@-625,-41 v1(-622.6,-38.6) v1(-622.6,145)
  Bottom Layer w10: R11.1 -773.32,-79.68 -742.64,-49 -633,-49 v1(-622.6,-38.6) ; v1(-622.6,145) U7.5
NetR12_1: R12.1 U5.1 | length 205.1
  Bottom Layer w12: R12.1 -1000.04,196.96 -932.5,264.5 U5.1
NetR12_2: R12.2 U4.2 U7.1 | length 480.1
  Top Layer w12: v1(-865,40) -865,43 v1(-660,248)
  Bottom Layer w10: v1(-660,248) U7.1
  Bottom Layer w12: R12.2 -912.86,40.36 U4.2 v1(-865,40)
NetR13_2: R13.2 U5.2 | length 271.1
  Bottom Layer w12: R13.2 -1025.36,529.96 -989.96,529.96 -970,510 U5.2
NetR16_1: R16.1 R17.2 U7.4 | length 343.1
  Bottom Layer w12: U7.4 -585.2,211.89 -552,245.09 -552,302 -523.96,330.04 R17.2 -489.64,324.64 R16.1@-399.64,234.64
  Bottom Layer w20: R16.1 R16.1@-399.64,234.64
NetR19_2: R19.2 U7.3 U8.8 | length 944.2
  Bottom Layer w10: U7.3 -585.2,330.93 -536.09,380.03 -536.09,433.09 -452,517.19 -452,685 -400,737 -218,737 U8.8 U8.8@-184.21,775
  Bottom Layer w20: U8.8 -91.96,775 -49.64,732.68 R19.2
NetR20_1: R20.1 R21.2 U8.7 | length 619.8
  Bottom Layer w20: R20.1 -92.6,855.04 -122.64,825 U8.7 -249,825 -276,852 -276,978 -233.96,1020.04 R21.2
NetR34_1: R34.1 U12.7 | length 946.3
  Top Layer w10: v1(523,381) 616.36,474.36 R34.1
  Bottom Layer w10: U12.7 8.11,283.2 61.96,337.04 479.04,337.04 v1(523,381)
PCF8583_INT: R27.1 U12.35 U15.7 | length 1124.7
  Top Layer w20: v1(425,-385) 694,-385 806,-385 870.04,-449.04 R27.1
  Bottom Layer w10: U12.35 145.91,-351.36 179.54,-385 v1(425,-385)
  Bottom Layer w20: v1(518,-385) U15.7
PGEC2: JX5.5 U12.17 | length 1535.7
  Top Layer w10: JX5.5@224.12,1208 JX5.5 224.12,1110.88 440,895 500,835 v1(500,634) v1@496,634
  Bottom Layer w10: U12.17 519.99,89.45 576,145.46 576,554 500,630 v1(500,634)
PGED2: JX5.4 U12.18 | length 1481.9
  Top Layer w10: JX5.4 318.09,1045.91 442.5,921.5 532,832 v1(532,643)
  Bottom Layer w10: U12.18@290.28,69.61 290.44,69.45 525.45,69.45 594,138 594,579 v1@530,643
RDE485_RB10: U9.2 U9.3 U12.23 | length 599.8
  Top Layer w10: v1(391,2) 450,61 594,61 v1(623,90)
  Bottom Layer w10: U12.23 360.34,-28.66 v1(391,2) ; v1(623,90) 714.41,181.41 U9.2 U9.3
RDE485_RE6: U12.2 U49.2 U49.3 | length 848.2
  Top Layer w10: v1(-464,-271) -226,-33 v1(-130.81,-33)
  Bottom Layer w10: U49.3 U49.2 -548.59,-355.59 v1(-464,-271) ; v1(-130.81,-33) -130.81,65.49 -90.32,105.98 U12.2
RS485A: JX3.2 R22.1 | length 201.5
  Bottom Layer w10: R22.1@396.78,929.53 R22.1@413.96,912.35
  Bottom Layer w20: JX3.2 376.78,959.53 R22.1@406.78,929.53 ; R22.1@396.78,929.53 R22.1@406.78,929.53 ; R22.1 R22.1@406.78,929.53
RS485B: JX3.1 R23.1 | length 518
  Bottom Layer w20: JX3.1 263.8,1014.15 540.43,1014.15 566,988.58 692.76,988.58 712,969.35 R23.1
RS_RX: JX1.2 U12.50 | length 1026.6
  Bottom Layer w10: JX1.2 -766.66,-498 -569,-498 -257.14,-186.14 U12.50
RS_TX: JX1.3 U12.51 | length 1045.9
  Bottom Layer w10: JX1.3 -856.22,-480 -576.46,-480 -262.91,-166.46 U12.51
RXD485_RP8: U9.1 U12.21 | length 765.3
  Top Layer w10: v1(475,133) v1(729,133)
  Bottom Layer w10: U12.21 235.88,10.71 222.81,23.78 222.81,115.81 240,133 v1(475,133) ; v1(729,133) 740,144 U9.1
RXD_RP19: U12.6 U49.1 | length 846.2
  Top Layer w10: v1(-518,-289) -236.19,-7.19 -102.19,-7.19 -83,12 v1(-83,17)
  Bottom Layer w10: v1(-83,17) -83,46.54 -11.57,117.97 U12.6
  Bottom Layer w12: U49.1 -559,-330 v1(-518,-289)
SCL1: R29.1 U11.6 U12.37 U15.6 | length 1512.3
  Bottom Layer w10: U12.37 106.53,-220.47 128,-199 188,-199 211,-222 211,-305 233,-327 444,-327 478,-361 478,-397 516,-435 U15.6
  Bottom Layer w20: U15.6 645,-435 756.65,-546.65 ; U11.6 690,-165 653,-202 653,-266 756.65,-369.65 756.65,-546.65 ; R29.1 756.65,-546.65
SDA1: R28.1 U11.5 U12.36 U15.5 | length 1855
  Bottom Layer w10: U12.36 126.22,-357.13 172.09,-403 354,-403 436,-485 U15.5
  Bottom Layer w20: U15.5 582.52,-552.52 610.04,-580.04 R28.1@610.04,-629.64 ; R28.1 550,-690.4 550,-804 577,-831 782,-831 842,-771 842,-548 795,-501 795,-327 730,-262 U11.5
SEG0: LCD1.5 U12.4 | length 421.9
  Top Layer w10: v1(32,361) 100,429 LCD1.5
  Bottom Layer w10: U12.4 -50.94,278.06 v1(32,361)
SEG1: LCD1.6 U12.8 | length 377.7
  Top Layer w10: LCD1.6 0,312 v1(36,276)
  Bottom Layer w10: U12.8 27.8,236.8 36,245 v1(36,276)
SEG2: LCD1.7 U12.11 | length 620.8
  Top Layer w10: LCD1.7 -100,225 9.19,115.81 10.1,115.81 25.91,100 66,100 v1(75,109)
  Bottom Layer w10: v1(75,109) 86.85,120.85 U12.11
SEG3: LCD1.8 U12.12 | length 725.8
  Top Layer w10: LCD1.8 -200,299.54 1.73,97.81 2.64,97.81 18.46,82 91.75,82 v1(101,91.25)
  Bottom Layer w10: v1(101,91.25) 106.53,96.78 U12.12
SEG4: LCD1.9 U12.13 | length 834
  Top Layer w10: LCD1.9 -300,374.09 -5.72,79.81 -4.81,79.81 14,61 114.5,61 v1(127,73.5)
  Bottom Layer w10: U12.13 127,179.22 v1(127,73.5)
SEG5: LCD1.10 U12.14 | length 945.1
  Top Layer w10: LCD1.10 -400,448.63 -13.18,61.81 -12.27,61.81 7.54,42 139.25,42 v1(153,55.75)
  Bottom Layer w10: U12.14 145.91,101.9 153,94.8 v1(153,55.75)
SEG6: LCD1.11 U12.15 | length 1055.8
  Top Layer w10: LCD1.11 -500,523.18 -20.63,43.81 -19.72,43.81 -5.19,29.28 -5.19,28.37 -0.82,24 165,24 v1(179,38)
  Bottom Layer w10: U12.15 165.59,107.67 179,94.26 v1(179,38)
SEG7: LCD1.12 U12.16 | length 1211.5
  Top Layer w10: LCD1.12 -500,-497.91 -10.09,-8 212,-8 253,33 253,150 v1(223,180)
  Bottom Layer w10: U12.16 v1(223,180)
SEG8: LCD1.13 U12.29 | length 1410.4
  Top Layer w10: LCD1.13 -400,-423.37 -3.82,-27.19 465.46,-27.19 474.27,-36 v1(474.27,-49.73)
  Bottom Layer w10: U12.29 377.23,-146.77 v1(474.27,-49.73)
SEG9: LCD1.14 U12.30 | length 1323.1
  Top Layer w10: LCD1.14 -300,-348.82 3.63,-45.19 273,-45.19 425.63,-45.19 460.44,-80 v1(460.44,-99.56)
  Bottom Layer w10: U12.30 393.54,-166.46 v1(460.44,-99.56)
SEG10: LCD1.15 U12.31 | length 1239.3
  Top Layer w10: LCD1.15 -200,-274.28 11.09,-63.19 399.19,-63.19 435.63,-99.63 435.63,-163.96 v1(437,-165.33)
  Bottom Layer w10: U12.31 416.19,-186.14 v1(437,-165.33)
SEG11: LCD1.16 U12.32 | length 1137.7
  Top Layer w10: LCD1.16 -100,-199.73 18.54,-81.19 368.36,-81.19 408,-120.83 408,-204 v1(396,-216)
  Bottom Layer w10: U12.32 336.83,-205.83 347,-216 v1(396,-216)
SEG12: LCD1.17 U12.33 | length 804.8
  Top Layer w10: LCD1.17 -5.81,-533.56 -5.81,-131 26,-99.19 134.19,-99.19 167,-132 v1(167,-227)
  Bottom Layer w10: v1(167,-227) 185.28,-245.28 U12.33 U12.33@185.28,-318.92
SEG13: LCD1.18 U12.42 | length 510.5
  Top Layer w10: v1(19,-217) 35,-217 56,-238 56,-495.37 LCD1.18
  Bottom Layer w10: 8.11,-234.96 U12.42 8.11,-228.11 v1@19.11,-217.11
SEG14: LCD1.19 U12.43 | length 576.6
  Top Layer w10: v1(34,-186) 42,-186 74,-218 74,-413.37 LCD1.19
  Bottom Layer w10: U12.43 -11.57,-196.57 -1,-186 v1(34,-186)
SEG15: LCD1.20 U12.44 | length 682.7
  Top Layer w10: v1(69,-177) 92,-200 92,-331.37 LCD1.20
  Bottom Layer w10: U12.44 -31.26,-190.8 -1.64,-161.19 53.19,-161.19 v1(69,-177)
SEG16: LCD1.21 U12.45 | length 789.1
  Top Layer w10: v1(84,-144) 110,-170 110,-241.46 110,-249.37 LCD1.21
  Bottom Layer w10: U12.45 -50.95,-185.03 -9.1,-143.19 v1@83.19,-143.19
SEG17: LCD1.22 U12.46 | length 958
  Top Layer w10: v1(109,-124) 128,-143 128,-234 353,-459 419.63,-459 LCD1.22
  Bottom Layer w10: U12.46 -70.63,-179.26 -9.37,-118 83,-118 ; v1@100,-118 83,-118 ; v1(109,-124) 103,-118 83,-118
TXD485_RP9: U9.4 U12.22 | length 713.9
  Top Layer w10: v1(475,177) v1(649.23,177)
  Bottom Layer w10: U12.22 230.11,-8.98 204.81,16.32 204.81,123.27 233.27,151.73 426.73,151.73 452,177 v1(475,177) ; v1(649.23,177) 663.23,191 U9.4
TXD_RP26: U12.5 U49.4 | length 901.1
  Top Layer w10: v1(-410,-253) -216,-59 -119,-59 -102,-42 v1(-99,-42)
  Bottom Layer w10: U49.4 -563.77,-406.77 v1(-410,-253) ; v1(-99,-42) -97,-40 -97,-9.09 -107.81,1.72 -107.81,47.19 -31.26,123.74 U12.5
URS485A: JX4.6 R42.1 | length 1128.3
  Top Layer w10: R42.1 -1220.88,-139.57 -1284,-76.46 -1284,276.52 -969.19,591.32 JX4.6
URS485B: JX4.5 R43.1 | length 1235.2
  Top Layer w10: R43.1 -1116.92,-218.08 -1266,-69 -1266,269.06 -913.52,621.55 JX4.5
VC_GP: D3.2 D7.2 JX1.5 Q1B.1 Q1B.2 Q1B.5 Q1B.6 R9.2 R10.1 R11.2 R25.2 R26.2 U2.1 U2.3 | length 3676.6
  Top Layer w20: U2.3 -778.5,-787.5 -796,-770 -796,-724 -784.5,-712.5 U2.1 ; D3.2@-626,614.32 -600,614.32 D3.2@-576.43,614.32 ; R26.2 -419.64,661.6 -377.04,619 -282,619 -207,694 323.04,694 R25.2
  Top Layer w50: JX1.5 v2(-855.9,-264.55) ; -746,-698 -855.9,-588.1 v2(-855.9,-264.55) ; v2(-713,135) -713,4 -713,-121.66 v2(-855.9,-264.55) ; v2(-600,449) -600,614.32 D3.2 -522.35,699.96 R26.2
  Bottom Layer w20: R9.2 R10.1 ; v2(-855.9,-264.55) -871.68,-248.77 R10.1 ; R11.2 R10.1
  Bottom Layer w50: -779,180 -714.85,182.5 ; v2(-713,135) -714.49,136.49 -714.49,334.51 v2(-600,449) -600,590.75 D7.2
VCC: C3.1 C4.1 C15.1 C18.1 C19.2 C26.2 C45.1 C49.2 C61.1 C62.1 C63.1 JX3.4 JX5.2 L1.1 R27.2 R28.2 R29.2 R30.2 R32.1 R33.2 R60.2 R62.2 R63.2 U2.5 U9.8 U11.3 U11.8 U15.8 U49.8 | length 8892.8
  Top Layer w12: -633,-287 -541.1,-195.1 v1(-541.1,-116)
  Top Layer w20: v1(-707,-287) -633,-287 -607.5,-312.5 U2.5 v1@-563.5,-712.5 ; v1(-563,-713) -563,-1108 -456.72,-1214.28 C63.1 ; C63.1@-263.04,-1214.64 -157.42,-1214.64 -51.81,-1214.64 53.81,-1214.64 159.42,-1214.64 C61.1@259.96,-1214.64 ; C61.1 267.24,-1207 455,-1207 620,-1042 620,-779.64 R30.2 v1(754,-779.64) R27.2 908.36,-779.64 1005.42,-682.58 v1(1005.42,-158.58) 1005.42,264 v1(1005,264.42) 1005,770 623,1152 553.83,1152 JX5.2 506.03,1035.97 553.42,988.58 667,988.58 706.36,949.22 C49.2 R33.2
  Bottom Layer w12: -783,-305 -782.91,-305.09 ; v1(-563,-713) v1@-559.36,-709.36 ; v1(-541.1,-116) -541.1,113.82 -524.96,129.96 R32.1 ; C3.1@-491.64,-713 C3.1 C3.1@-491.64,-709.36 ; U9.8 747.05,429.96 C15.1 829.64,421.71 L1.1 L1.1@919.64,330.04 ; C26.2@1020.28,330.04 C26.2
  Bottom Layer w20: -783,-305 -765,-287 -709,-287 -674.96,-252.96 C45.1 ; U49.8 -782.91,-305.09 ; v1(-563,-713) C3.1@-491.64,-713 ; C3.1 C4.1 ; 209,1285.36 ccw(c209,1185.36) 109,1185.36 109,996 109,891 158.58,841.42 JX3.4 JX3.4@322.42,841.42 ; 215.09,1286.43 cw(c124,666) 460.18,1195.36 ; 464,1194 499.48,1118.2 JX5.2 JX5.2@506.03,1111.65 ; U15.8 582.52,-185.99 703.51,-65 812,-65 912,-165 U11.3 999,-165 v1(1005.42,-158.58) 1021.08,-142.92 C18.1 C19.2 ; R28.2 756.64,-720.36 754,-723 v1(754,-779.64) ; L1.1@919.64,330.04 919.72,329.96 C26.2 1005,314.6 v1(1005,264.42)
WP_RB12: R30.1 U11.7 U12.34 | length 1577.8
  Top Layer w20: v1(310,-356) 387,-433 801.96,-433 v1(830,-461.04) 830,-615 755.36,-689.64 R30.1 R30.1
  Bottom Layer w10: U12.34 165.59,-345.59 176,-356 v1(310,-356)
  Bottom Layer w20: U11.7 805,-115 830,-140 v1(830,-461.04)
pads on no net: JX3.0 S1.2 S1.4 S2.2 S2.4 S3.2 S3.4 U2.4 U5.4 U5.5 U12.27 U12.28 U12.47 U12.48 U12.58 U12.64

## Polygon pours and split planes (outlines as drawn)
GND on Top Layer "Top Layer-No Net" (solid, remove dead copper, pour order 2): -1338.58,0 ccw(c0,0) 0,-1338.58 ccw(c0,0) 1338.58,0 ccw(c0,0) 0,1338.58 ccw(c0,0)
GND on Bottom Layer "Bottom Layer-No Net" (solid, remove dead copper, pour order 4): -1338.58,0 ccw(c0,0) 0,-1338.58 ccw(c0,0) 1338.58,0 ccw(c0,0) 0,1338.58 ccw(c0,0)

## Keep-outs
Keep-Out Layer:
  circle w10: c0,1181.1 r59.06
  circle w10: c-748.03,-937.01 r59.06
  circle w10: c0,0 r1338.58
  circle w10: c748.03,-937.01 r59.06
  circle w10: c1181.1,0 r39.37
  circle w10: c-1181.1,0 r39.37

## Other copper
Top Layer:
  pour cut-out: 235.6,-341.6 324.28,-341.72 328.77,-348.82 332,-393
  pour cut-out: 364.95,-385 425,-385 425,-419 424,-420
  pour cut-out: -308.04,-1074.28 304.96,-1074.28 304.96,-1264.28 -308.04,-1264.28
  pour cut-out: -500,-497.91 498.91,-497.91 504,-499 505,-504 505,-579 -501,-579 -503,-577
  pour cut-out: -500,587.07 100,587.07 100,498 -494,498 -500,504
  pour cut-out: -470.36,945.04 -469.64,944.31 -469.64,654.96 -279.64,654.96 -280.36,655.69 -280.36,945.04
  pour cut-out: 72,789 72,1043 70.04,1044.96 -62.65,1044.96 -80,1027.61 -180,1027.61 -180,981 -180.24,980.76 -285,981 -280.36,820.41 -280.36,800.36 -219,789
  pour cut-out: -290,1076.77 -170,1076.77 -143.39,1103.39 -143.39,1223.39 -170,1250 -290,1250 -316.61,1223.39 -316.61,1103.39
  pour cut-out: -650,830.94 -550,830.94 -550,579.36 -650,579.36 -650,660 -653,657 -748,657 -748,771
  pour cut-out: 279,844.96 469,844.96 469,654.96 279,654.96
  pour cut-out: 566.36,870 566.36,585.04 756.36,585.04 756.36,960 621,988.58 621,870
  pour cut-out: -1265.88,-221 -1071.92,-221 -1071.92,-411 -1265.88,-411
  pour cut-out: -316.87,1075.85 -495,1075 -617.36,905.75 -381.65,904.61
  pour cut-out: 646,974.56 646.36,946.56 670,969.44 672,969.44
  pour cut-out: 36,258 36,111 25,100
  pour cut-out: -987,719 -932,774 -926,774 -926,768.97 -913.52,756.48
  pour cut-out: 584.96,-639.64 915.04,-639.64 915.04,-829.64 584.96,-829.64
  pour cut-out: -927,-316 -983.03,-260.75 -1018.21,-295.93 -1018.21,-320.79
  pour cut-out: -1150.12,-545.65 -1144.42,-521.1 -1190.49,-475.03
  pour cut-out: 62,-972 105.48,-956.64 114.3,-972.82 114.3,-1074.28
Bottom Layer:
  rectangle net VC_GP: -924,151 -758,208
  pour cut-out: 113.7,1111.1 258.27,1111.1 259.37,1110 259.37,841.42 114.7,914 113.7,915
  pour cut-out: 366.96,979.35 366.96,784.35 757,784.35 757,979.35
  pour cut-out: 649.23,177 649.23,124.77 652,122 663,133 729,133
  pour cut-out: 779.64,474.96 894.64,474.96 894.64,376.71 970.36,374.96 1160.36,374.96 1160.36,284.96 896.38,284.96 894.64,286.71 894.64,-4.96 779.64,-4.96
  pour cut-out: 625.36,-64.96 625.36,25.04 410.46,25.04 453,-65
  pour cut-out: 1154,-288 1194,-276 1256,-106 1257,-101 1257,-98 1016,-97.92 1016,-288
  pour cut-out: 891.57,-561.57 891.57,-258.43 639.61,-258.43 639.61,-561.57
  pour cut-out: 733,-53 971,-57 971,-65 1026,-215 730,-215
  pour cut-out: 997.39,-480 997,-385 937,-322 861,-334 870.04,-485
  pour cut-out: 660,-335 662,-333 662,-438 661,-439 471,-439 464,-432 464,-341.74 470.74,-335
  pour cut-out: 566,-439 565.04,-770.36 655.04,-770.36 655.04,-580.36
  pour cut-out: -116.85,-612.01 119.37,-612.01 119.37,-967.75 117.48,-969.64 -105.04,-969.64 -105,-737.99 -116.85,-737.99
  pour cut-out: 100.36,-404.96 100.36,-494.96 215.36,-494.96 215.36,-404.96
  pour cut-out: -310.36,474.96 -310.36,384.96 -350,384.96 -349.64,-114.96 -379,-114.96 -379,-213.68 -380.36,-215.04 -384.4,-211 -484,-211 -484,-165 -558.36,-165.04 -552,-115 -464.64,-114.96 -465.36,74.96 -540.36,74.96 -540.36,374.31 -539.64,375.04 -500,375.04 -500.36,474.96
  pour cut-out: -1247.64,384.04 -1057.64,384.04 -1057.64,94.69 -1058.36,93.96 -1148.96,93.96 -1149,94 -1149,289 -1242.6,289 -1247.64,294.04
  pour cut-out: -1045.04,180.36 -1045.04,-9.64 -955.04,-9.64 -955.04,180.36
  pour cut-out: -1170.36,484.96 -1170.36,574.96 -980.36,574.96 -980.36,484.96
  pour cut-out: -1288.96,-129.36 -1097.96,-129.36 -1097.96,-244.36 -1288.96,-244.36
  pour cut-out: -1007.5,432.5 -932.5,432.5 -932.5,307.5 -1007.5,307.5
  pour cut-out: -920.55,257.18 -767,257 -809.45,138.35 -872.44,138.35 -922,185
  pour cut-out: -955.73,510 -907.42,510 -907.42,455.06
  pour cut-out: -874.96,475.04 -759.96,475.04 -759.96,385.04 -704,385.04 -704,312 -874,312 -875,311
  pour cut-out: -874.96,578.96 -876,580 -621.22,580 -491,641 -491,764 -778.7,759.73 -778.7,675 -874.82,675 -874.96,675.14
  pour cut-out: -593.7,690 -342.13,690 -342.13,684.74 -340.82,683.43 -339.21,685.04 -214.64,685.04 -214.64,595.04 -337.09,595.04 -342.13,590 -593.7,590
  pour cut-out: -590,947.87 -490,947.87 -490,696.3 -590,696.3
  pour cut-out: -400,925 -454.24,775 -465,744 -321,738 -180,775 -180,925
  pour cut-out: -99.64,810.04 90.36,810.04 90.36,900.04 -99.64,900.04
  pour cut-out: -99.64,1065.04 15.36,1065.04 15.36,975.04 -99.64,975.04
  pour cut-out: -99.64,735.04 90.36,735.04 90.36,645.04 -99.94,645.04 -100.01,644.96
  pour cut-out: 310.36,325.04 425.36,325.04 425.36,235.04 310.36,235.04
  pour cut-out: -533,-659.36 -339.08,-659.36 -339.08,-774.36 -533,-774.36
  pour cut-out: -1015.04,-57.36 -719.96,-57.36 -719.96,-132.36 -629.96,-132.36 -629.96,-247.36 -1015.04,-247.36
  pour cut-out: -410,-253 -410,-193 -406,-189
  pour cut-out: 278,-427 278,-405 276,-403
  pour cut-out: 46.28,375.28 55.96,337.04 81,337.04
  pour cut-out: -149,348 -103,348 -58,353 -52.73,376.16 -149,368.2
  pour cut-out: -45,377.7 -65,362 13.34,368.73 32,381.2
  pour cut-out: 223,189 223,277.04 220,280.04 190.96,251 158,251
  pour cut-out: 311,-48 311,-87.72 327,-87.72
  pour cut-out: 6,1015 139,1015 141,1013 141,979
  pour cut-out: -600,532 -502,532 -500,530
  pour cut-out: -550.75,640 -384.25,640 -400,624.25 -400,539.37
  pour cut-out: -583,581 -502,532 -500.36,530.36 -500.36,176.64 -554.5,122.5 -555.37,-14.5 -598.5,-14.5 -633,-49 -957,-49 -957,196 -991,230 -991,317 -870.71,580
  pour cut-out: 259,-218 207,-218 200.05,-211.05
  pour cut-out: -140.18,74.86 -165,74 -165,135 -106.76,135 -105.11,133.36
  pour cut-out: 10,995 90.36,995 96.02,878.02 33,900.04 15.36,975.04
  pour cut-out: 107,314 123,325 141.79,323.79 153.58,312 158,312 158,280.04 121,286
  pour cut-out: 22,-319 22,-364 -31,-417 -53,-417

## Silkscreen, mask and mechanical layers (free items; w line width, h text height)
Top Overlay:
  circle w10: c748.03,-937.01 r118.11
  circle w10: c1181.1,0 r78.74
  circle w10: c-1181.1,0 r78.74
  circle w10: c-748.03,-937.01 r118.11
  circle w10: c0,1181.1 r118.11
  lines w10: -374.02,780 -374.02,820 ; 374.02,780 374.02,820
Bottom Overlay:
  circle w10: c748.03,-937.01 r108.27
  circle w10: c1181.1,0 r82.68
  circle w10: c-1181.1,0 r82.68
  circle w10: c-748.03,-937.01 r108.27
  circle w10: c0,1181.1 r108.27
  lines w10: 990,411 990,396 ; 1008,396 990,396 ; 1083,426 1020,426 990,396
  text "1879WCG" at 267,-1186 h60
Mechanical 1:
  circle w10: c0,0 r1338.58
  circle w10: c1181.1,0 r39.37
  circle w10: c-1181.1,0 r39.37